# Altium PCB layout.PcbDoc
Units mil, origin at the board's own origin, x right, y up, seen from the top; angles counter-clockwise.
Board outline 3375 x 2125 mil, 2 copper layers (Top Layer, Bottom Layer); 14 components, 10 nets, 39 pads, 0 vias.
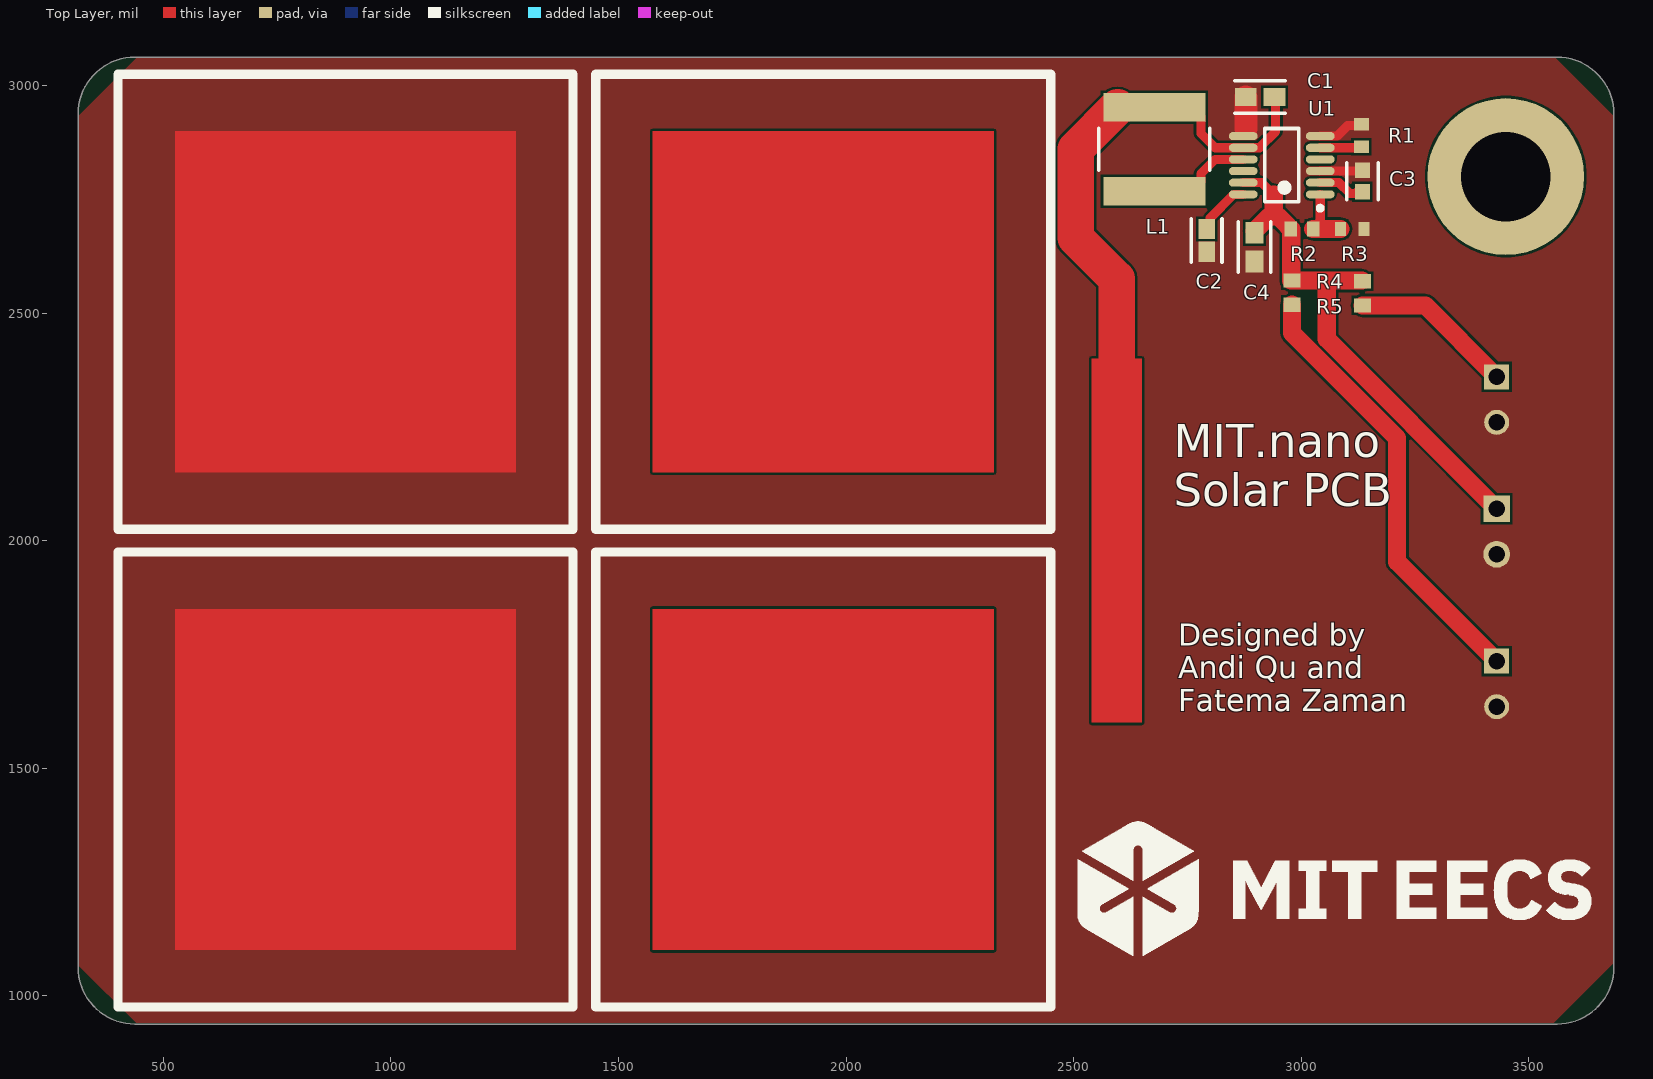
[diagram p0: Top Layer view]
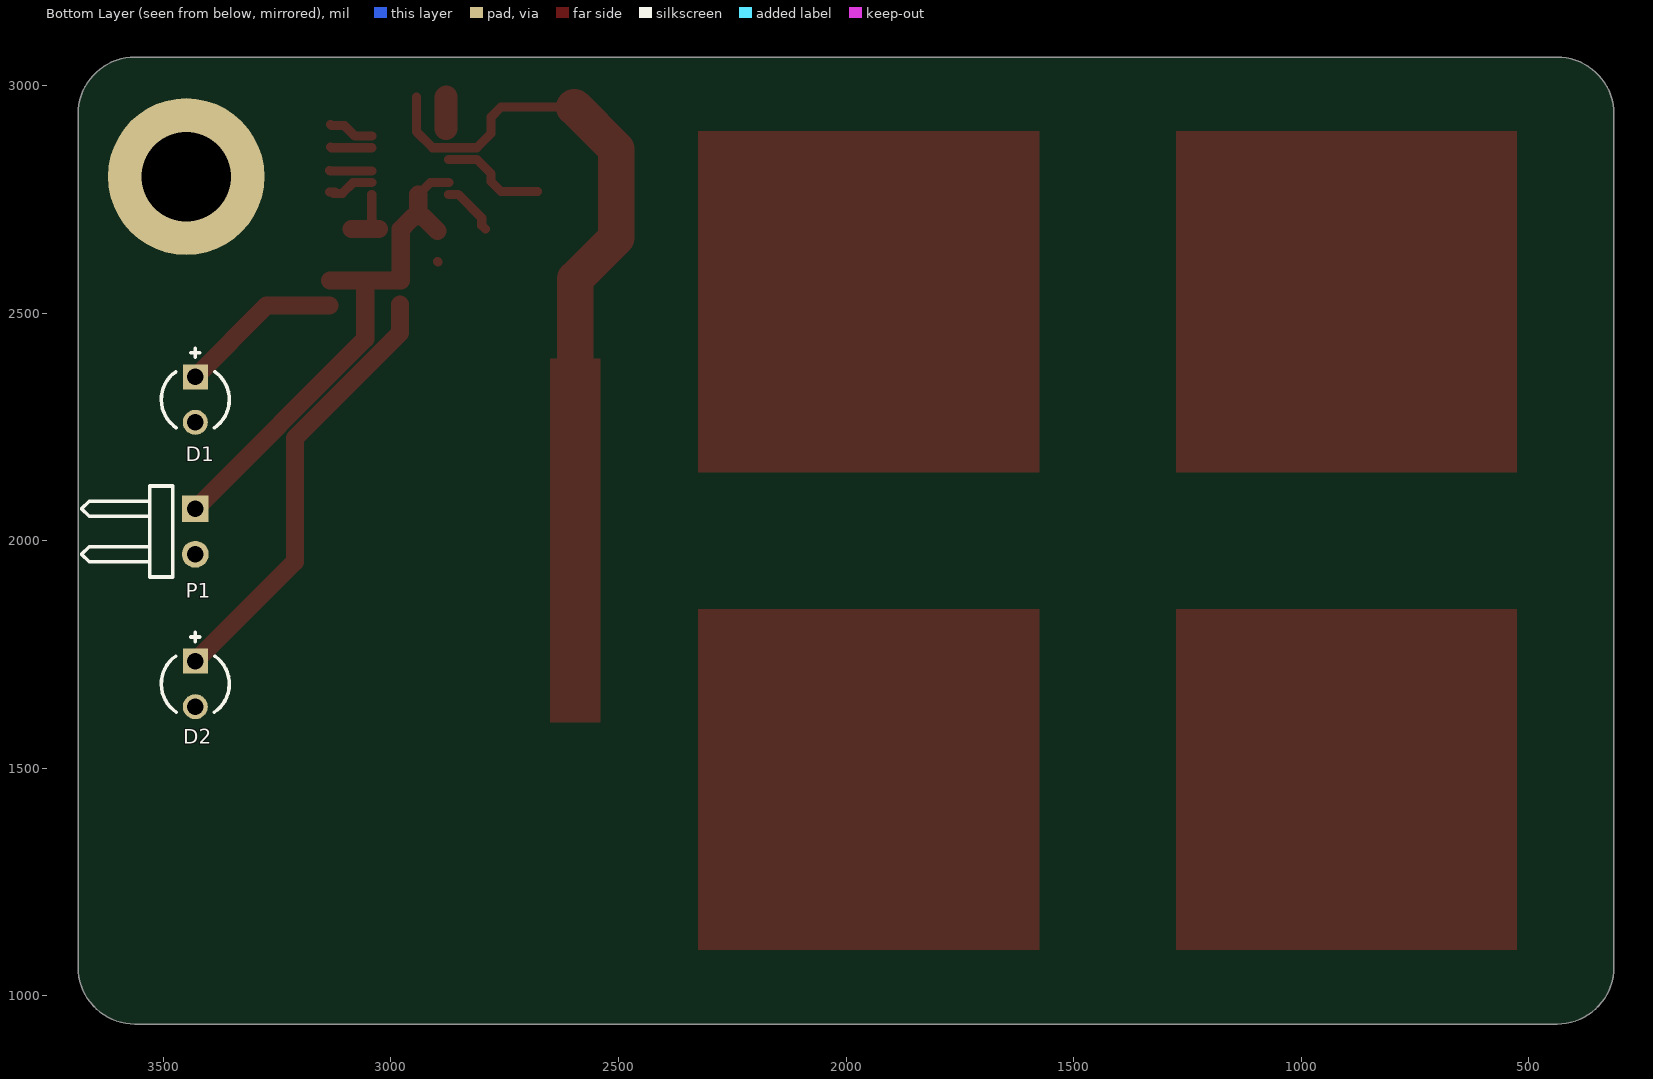
[diagram p1: Bottom Layer view, seen from below]

## Layer stack, top to bottom
Top Solder: solder mask 0.4, Solder Resist, Dk 3.5
Top Layer: signal copper 1.4
Dielectric 1: dielectric 12.6, FR-4, Dk 4.8
Bottom Layer: signal copper 1.4
Bottom Solder: solder mask 0.4, Solder Resist, Dk 3.5

## Board outline
312.5,1062.5 312.5,2937.5 cw(c437.5,2937.5) 437.5,3062.5 3562.5,3062.5 cw(c3562.5,2937.5) 3687.5,2937.5 3687.5,1062.5 cw(c3562.5,1062.5) 3562.5,937.5 437.5,937.5 cw(c437.5,1062.5)

## Design rules (kind name [scope] priority, off if disabled: settings)
Clearance [All] p1: gap=5 ignorepadtopadclearanceinfootprint=TRUE
PolygonConnect [All] p1: connectstyle=Direct reliefconductorwidth=10 reliefentries=4 polygonreliefangle="90 Angle" airgapwidth=10
RoutingVias [All] p1: holewidth=28 width=50 viastyle="Through Hole" minholewidth=28 minwidth=50 maxholewidth=28 maxwidth=50
SolderMaskExpansion [All] p1: expansion=4 istentingtop=FALSE
Width [All] p1: maxlimit=200 minlimit=10 preferedwidth=10 minimp=50.000000 maximp=50.000000 favimp=50.000000
30 further rules are at their usual default settings.

## Components (designator, comment, footprint, x,y, rotation, side; value= is the part's Value field where it differs from the comment)
C1 "10uF" FP-GRM188-0_1-e0_2_0_55-IPC_A 2910,2975 r0 top
C2 "1uF" FP-C1608-080-0_1-IPC_B 2792.6,2659.78 r90 top
C3 "4.7uF" FP-GRM188-0_15-IPC_C 3135,2790 r90 top
C4 "10uF" FP-GRM188-0_1-e0_2_0_55-IPC_A 2897.6,2645 r270 top
D1 "LTL-1CHE" INDPR60-254-520X380X650 3430,2310 r270 bottom
D2 "LTL-1CHE" INDPR60-254-520X380X650 3430,1685 r270 bottom
L1 "10uH" FP-NR6028-MFG 2677.6,2860 r270 top
P1 "Header 2H" HDR1X2H 3430,2070 r270 bottom
R1 "84.5K" RESC1608X55X30LL15T15 3132.6,2890 r270 top
R2 "84.5K" RESC1608X55X30LL15T15 3002.2,2685 r180 top
R3 "39K" RESC1608X55X25LL10T15 3112.6,2685 r0 top
R4 "56" RESC1608X55X30NL15T15 3135,2543.43 r270 top
R5 "56" RESC1608X55X30NL15T15 2980,2545 r270 top
U1 "LTC3105EMS#PBF" LT-MS-12_N 2957.6,2825 r180 top

## Footprints (in the part's own frame and the unit in brackets; to place one, negate y for a bottom-side part, rotate by r counter-clockwise, add the part's x,y. Pads: shape width x height; smd on the part's side, far side on the other; paste and mask are expansions set on the pad)
FP-C1608-080-0_1-IPC_B [mil]
  rect 44.53x35.91 smd paste+0 mask+0: 1(-25.22,0) 2(25.22,0)
  silkscreen extent -47,-34 47,34, body extent -57,-28 57,28, height 10
FP-GRM188-0_1-e0_2_0_55-IPC_A [mil]
  rect 47.57x39.85 smd paste+0 mask+0: 1(-31.57,0) 2(31.57,0)
  silkscreen extent -55,-36 55,36, body extent -75,-40 75,40, height 10
FP-GRM188-0_15-IPC_C [mil]
  rect 33.71x33.79 smd paste+0 mask+0: 1(-23.66,0) 2(23.66,0)
  silkscreen extent -41,-34 41,34
FP-NR6028-MFG [mm]
  rect 1.6x5.7 smd paste+0 mask+0: 1(-2.35,0) 2(2.35,0)
  silkscreen extent -1.17,-3.1 1.17,3.1, body extent -3.25,-3.2 3.25,3.2, height 0.25
HDR1X2H [mm] "Connector; Header; 2 Position; Right Angle"
  rect 1.5x1.5 hole 0.9: 1(0,0)
  round 1.5 hole 0.9: 2(2.54,0)
  silkscreen extent -1.27,-6.35 3.81,-1.27
INDPR60-254-520X380X650 [mm] "THD, 2-Leads, Dia 3.8mm, Pitch 2.54mm"
  rect 1.4x1.4 hole 0.9: 1(-1.27,0)
  round 1.4 hole 0.9: 2(1.27,0)
  silkscreen extent -2.87,-1.9 1.58,1.9, body extent -1.9,-1.9 1.9,1.9, height 6.5
LT-MS-12_N [mm] "SOP, 12-Leads, Body 4.1x3.1mm, Pitch 0.65mm, IPC Medium Density"
  oval 1.6x0.45 smd: 1(-2.15,1.625) 2(-2.15,0.975) 3(-2.15,0.325) 4(-2.15,-0.325) 5(-2.15,-0.975) 6(-2.15,-1.625) 7(2.15,-1.625) 8(2.15,-0.975) 9(2.15,-0.325) 10(2.15,0.325) 11(2.15,0.975) 12(2.15,1.625)
  silkscreen extent -2.28,-2.05 0.95,2.52, body extent -1.55,-2.05 1.55,2.05, height 1.1
RESC1608X55X25LL10T15 [mm] "Chip Resistor, 2-Leads, Body 1.60x0.80mm, IPC High Density"
  rect 0.6x0.8 smd: 1(-0.65,0) 2(0.65,0)
  body extent -0.85,-0.45 0.85,0.45, height 0.55
RESC1608X55X30LL15T15 [mm] "Chip Resistor, 2-Leads, Body 1.60x0.80mm, IPC High Density"
  rect 0.7x0.85 smd: 1(-0.625,0) 2(0.625,0)
  body extent -0.87,-0.48 0.87,0.48, height 0.55
RESC1608X55X30NL15T15 [mm] "Chip Resistor, 2-Leads, Body 1.60x0.80mm, IPC Medium Density"
  rect 0.8x0.95 smd: 1(-0.675,0) 2(0.675,0)
  body extent -0.87,-0.48 0.87,0.48, height 0.55

## Part data
C1 C4: library part CMP-2006-02792-2, "Chip Multilayer Ceramic Capacitors for General Purpose, 0603, 10uF, X5R, 15%, 20%, 6.3V", Case Code (Imperial)=0603, Case Code (Metric)=1608, Dielectric=X5R, Max Operating Temperature=85°C, Min Operating Temperature=-55°C, Package Quantity=4000, Tolerance=20%, Voltage=6.3V, Capacitance=10uF, Case/Package=0603, Depth=0.8mm, Height=0.8mm, Lead Free="Lead Free", Length=1.6mm, Material=Ceramic, Mount="Surface Mount", Packaging="Tape and Reel", Radiation Hardening=No, REACH SVHC="No SVHC", Termination=SMD/SMT, Thickness=0.035inch, Voltage Rating=6.3V, Voltage Rating (DC)=6.3V, Width=0.031inch
C2: library part CMP-2000-06025-2, "Multilayer Ceramic Capacitors 1μF ±10% 50V X5R SMD 0603", Case Code (Imperial)=0603, Case Code (Metric)=1608, Dielectric=X5R, Dielectric Material=Ceramic, Max Operating Temperature=85°C, Min Operating Temperature=-55°C, Package Quantity=1, Tolerance=10%, Voltage=50V, Capacitance=1uF, Case/Package=0603, Construction=Flat, Depth=0.8mm, Height=0.8mm, Lead Free="Lead Free", Length=1.6mm, Mount="Surface Mount", Number of Pins=2, Packaging="Tape and Reel", Radiation Hardening=No, REACH SVHC="No SVHC", Resistor Type=Ceramic, RoHS Compliant=Yes, Series=C, Termination=SMD/SMT, Thickness=0.035inch, Voltage Rating=50V, Voltage Rating (DC)=50V, Weight=7.1E-05oz, Width=0.031inch
C3: library part CMP-2006-02523-2, "Chip Multilayer Ceramic Capacitors for General Purpose, 0603, 4.7uF, X5R, 15%, 10%, 25V", Case Code (Imperial)=0603, Case Code (Metric)=1608, Dielectric=X5R, Max Operating Temperature=85°C, Min Operating Temperature=-55°C, Package Quantity=4000, Tolerance=10%, Voltage=25V, Capacitance=4.7uF, Case/Package=0603, Depth=0.8mm, Height=0.8mm, Lead Free="Lead Free", Length=1.6mm, Material=Ceramic, Mount="Surface Mount", Packaging="Cut Tape", REACH SVHC="No SVHC", Thickness=0.031inch, Voltage Rating=25V, Voltage Rating (DC)=25V, Width=0.031inch
D1 D2: library part CMP-1674-00005-1, "Radial LED, 12.6 mcd, 20 mA, 2 V, -55 to 100 degC, 2-Pin THD, RoHS, Bulk", Case\Package=Radial, Current Rating="3.6 A", Max Operating Temperature="130 degC", Min Operating Temperature="-40 degC", Package Quantity=55, Resistance="0.045 Ohm", Tolerance=20%, ComponentLink1Description="Manufacturer URL", ComponentLink1URL=http://www.us.liteon.com/, ComponentLink2Description=Datasheet, ComponentLink2URL=https://datasheet.ciiva.com/15117/getdatasheetpartid-187746-15117985.pdf, DatasheetVersion=Dec-03, Height="1.1 inch", Lead Pitch="11.44 mm", Length="0.97 inch", Mount="Through Hole", PackageDescription="2-Pin Through Hole Device, Dia 3.8 mm, Pitch 2.54 mm", PackageReference=LTL-1CHE, Packaging=Tray, Radiation Hardening=No, RoHSCompliant=true, Shielding=Unshielded, Width="0.62 inch"
L1: library part CMP-14484-000406-1, "SMD Power Inductors 10uH ±20% 1.9A 84.5mΩ", Case/Package=2424, Current Rating=1.9A, DC Resistance (DCR)=84.5mR, Inductance Tolerance=20%, Max Operating Temperature=120°C, Min Operating Temperature=-25°C, Package Quantity=2000, Resistor Type=Wirewound, Self Resonant Frequency=20MHz, Test Frequency=100kHz, Core Material=Ferrite, Halogen Free="Halogen Free", Height=2.8mm, Height - Seated (Max)=0.11inch, Inductance=10uH, Lead Free="Lead Free", Length=0.236inch, Max DC Current=1.9A, Mount="Surface Mount", Number of Pins=2, Packaging="Tape and Reel", RMS Current (Irms)=1.9A, RoHS Compliant=Yes, Saturation Current=1.9A, Series=NR, Shielding=Shielded, Termination=SMD/SMT, Tolerance=20%, Width=6mm
P1: library part CMP-002-000090-1, "Header, 2-Pin, Right Angle", Component Type=Standard, Design Item ID="Header 2H", LatestRevisionDate=17-Jul-2002, LatestRevisionNote="Re-released for DXP Platform.", Pin Count=2, Publisher="Altium Limited", Source="Miscellaneous Connectors.SchLib"
R1 R2: library part CMP-1012-00728-2, Manufacturer=Panasonic, Part Number=ERJ-3EKF8452V
R3: library part CMP-2000-06940-1, "Chip Resistor, 39 KOhm, +/- 1%, 0.1 W, -55 to 155 degC, 0603 (1608 Metric), RoHS, Tape and Reel", Case Code - in=0603, Case Code - mm=1608, Manufacturer=Yageo, Operating Temperature Range=-55Cto+155C, Package Description="2-Pin Surface Mount Device, Body 1.6 x 0.8 mm", Power Rating=100mW, Resistance=39kOhms, Temperature Coefficient=100PPM/C, Tolerance=1%, Voltage Rating=50V, Datasheet URL=http://www.yageo.com/documents/recent/PYu-RC_Group_51_RoHS_L_7.pdf, Datasheet Version="Rev. 7, 05/2017", Manufacturer URL=http://www.yageo.com/, Mounting Technology=SurfaceMount, Package Reference=0603, Packaging=Reel, Product=ThickFilmResistorsGeneralPurpose, Series=RC, Termination Style=SMD/SMT
R4 R5: library part CMP-2000-00572-1, Manufacturer=Panasonic, Part Number=ERJ3EKF56R0V
U1: library part CMP-0473-00104-1, "400 mA Step-Up DC/DC Converter with Maximum Power Point Control and 250 mV Start-Up, 12-pin SOP (MS-12), -40 to 85 degC, Pb-Free", Manufacturer="Linear Technology", ComponentLink1Description="Manufacturer URL", ComponentLink1URL=http://www.linear.com/, ComponentLink2Description=Datasheet, ComponentLink2URL=http://cds.linear.com/docs/en/datasheet/3105fa.pdf, ComponentLink3Description="Package Specification", ComponentLink3URL=http://cds.linear.com/docs/en/packaging/05081668_A_MS12.pdf, DatasheetVersion="Rev. A", Energy Source=Solar, Mounting Technology="Surface Mount", Number of Outputs=1, PackageDescription="12-Pin Plastic MSOP, Body 4.039 x 3 mm, Pitch 0.65 mm", PackageReference=MS-12, PackageVersion="Rev. A, 05/2013", PartNumber=LTC3105EMS#PBF, RoHS=TRUE, Topology=Boost, Vin Max(V)=5, Vin Min(V)=0.225, Vout Max(V)=5.25

## Free pads (board coordinates)
  round 344.49 hole 196.85: 2(3450,2800)

## Nets (pads, with @x,y where several pads share a name; then routed paths per layer and width w, separated by ;. In a path a pad name is that pad's centre, name@x,y a point inside that pad or via, vN(x,y) a via of type N, cw(c..) or ccw(c..) an arc to the next point about the centre after c; other vN are vias at no path point)
3.3V: C4.1 P1.1 R2.2 R4.1 R5.1 U1.11 | length 1148
  Top Layer w20: U1.11 2913.39,2786.61 2940,2760 ; C4.1 C4.1@2897.6,2680.43
  Top Layer w40: C4.1@2897.6,2680.43 2929.76,2712.6 2940,2712.6 ; 2940,2760 2940,2712.6 ; R2.2@2970.87,2691.73 2950,2712.6 2940,2712.6 ; R2.2 2978.43,2684.17 R5.1@2978.43,2571.57 ; R5.1 3056.71,2571.57 ; R4.1@3133.43,2571.57 3056.71,2571.57 ; P1.1 3056.71,2443.29 3056.71,2571.57
GND: C1.1 C2.1 C3.2 C4.2 D1.2 D2.2 P1.2 R1.1 R3.2 U1.3 U1.6 U1.7 | length 266.2
  Top Layer w20: C4.2@2896.3,2612.13 C4.2 ; U1.3 3133.54,2812.2 C3.2 ; U1.6 3078.98,2888.98 3102.13,2912.13 3130.13,2912.13 R1.1
  Top Layer w50: C1.1 2878.91,2974.52 2878.91,2905.12
NetC2_2: C2.2 U1.12 | length 121.2
  Top Layer w20: C2.2 2800.55,2692.96 2800.55,2708.98 2852.6,2761.02 U1.12
NetC3_1: C3.1 U1.2 | length 110
  Top Layer w20: U1.2 3083.39,2786.61 3106.8,2763.2 3125.74,2763.2 3122.6,2766.34 C3.1
NetD1_1: D1.1 R4.2 | length 360
  Top Layer w40: R4.2 3273.15,2516.85 D1.1
NetD2_1: D2.1 R5.2 | length 969.8
  Top Layer w40: R5.2 2980,2456.36 3211.22,2225.14 3211.22,1953.78 D2.1
NetL1_2: L1.2 U1.9 | length 234.5
  Top Layer w20: L1.2 2758.31,2767.48 2779.8,2788.98 2779.8,2806.14 2811.46,2837.8 U1.9
NetR1_2: R1.2 U1.5 | length 91.2
  Top Layer w20: U1.5 3130.59,2863.39 R1.2
NetR2_1: R2.1 R3.1 U1.1 | length 142.6
  Top Layer w20: R2.1 3026.81,2687.95 3042.24,2703.39 U1.1
  Top Layer w40: R2.1 R3.1
VCC: C1.2 L1.1 U1.8 | length 1523.8
  Top Layer w20: L1.1@2596.89,2952.52 L1.1 2758.31,2952.52 2779.8,2931.02 2779.8,2895.04 2811.46,2863.39 2908.39,2863.39 2944.17,2899.17 C1.2@2944.17,2975
  Top Layer w80: 2595,2000 2595,2575.29 2505,2665.29 2505,2860.63 L1.1@2596.89,2952.52
pads on no net: U1.4 U1.10

## Polygon pours and split planes (outlines as drawn)
GND on Top Layer "GND_L01_P000" (solid, remove dead copper, pour order 0): 440,3060 315,2935 315,1065 440,940 3555,940 3685,1070 3685,2935 3560,3060 3555,3060

## Other copper
Top Layer:
  rectangle: 1575,1100 2325,1850
  rectangle net GND: 525,1100 1275,1850
  rectangle net GND: 525,2150 1275,2900
  rectangle: 1575,2150 2325,2900
  rectangle net VCC: 2540,1600 2650,2400

## Silkscreen, mask and mechanical layers (free items; w line width, h text height)
Top Overlay:
  drawing of 26 lines, arcs and shapes, not listed
  text "MIT.nano / Solar PCB" at 2720,2075 h72
  text "Designed by / Andi Qu and / Fatema Zaman" at 2730,1625 h48
Mechanical 1:
  the board outline again, w10